# Altium PCB MCU.PcbDoc (part 2 of 2)
Units mil, origin at the board's own origin, x right, y up, seen from the top; angles counter-clockwise.
Board outline 3149.61 x 1968.5 mil, 4 copper layers (L1(Signal), L2(PWR), L3(GND), L4(Signal)), stack 59.53 mil thick; 84 components, 75 nets, 297 pads, 175 vias.
Unrouted connection lines stored in the file: 10.
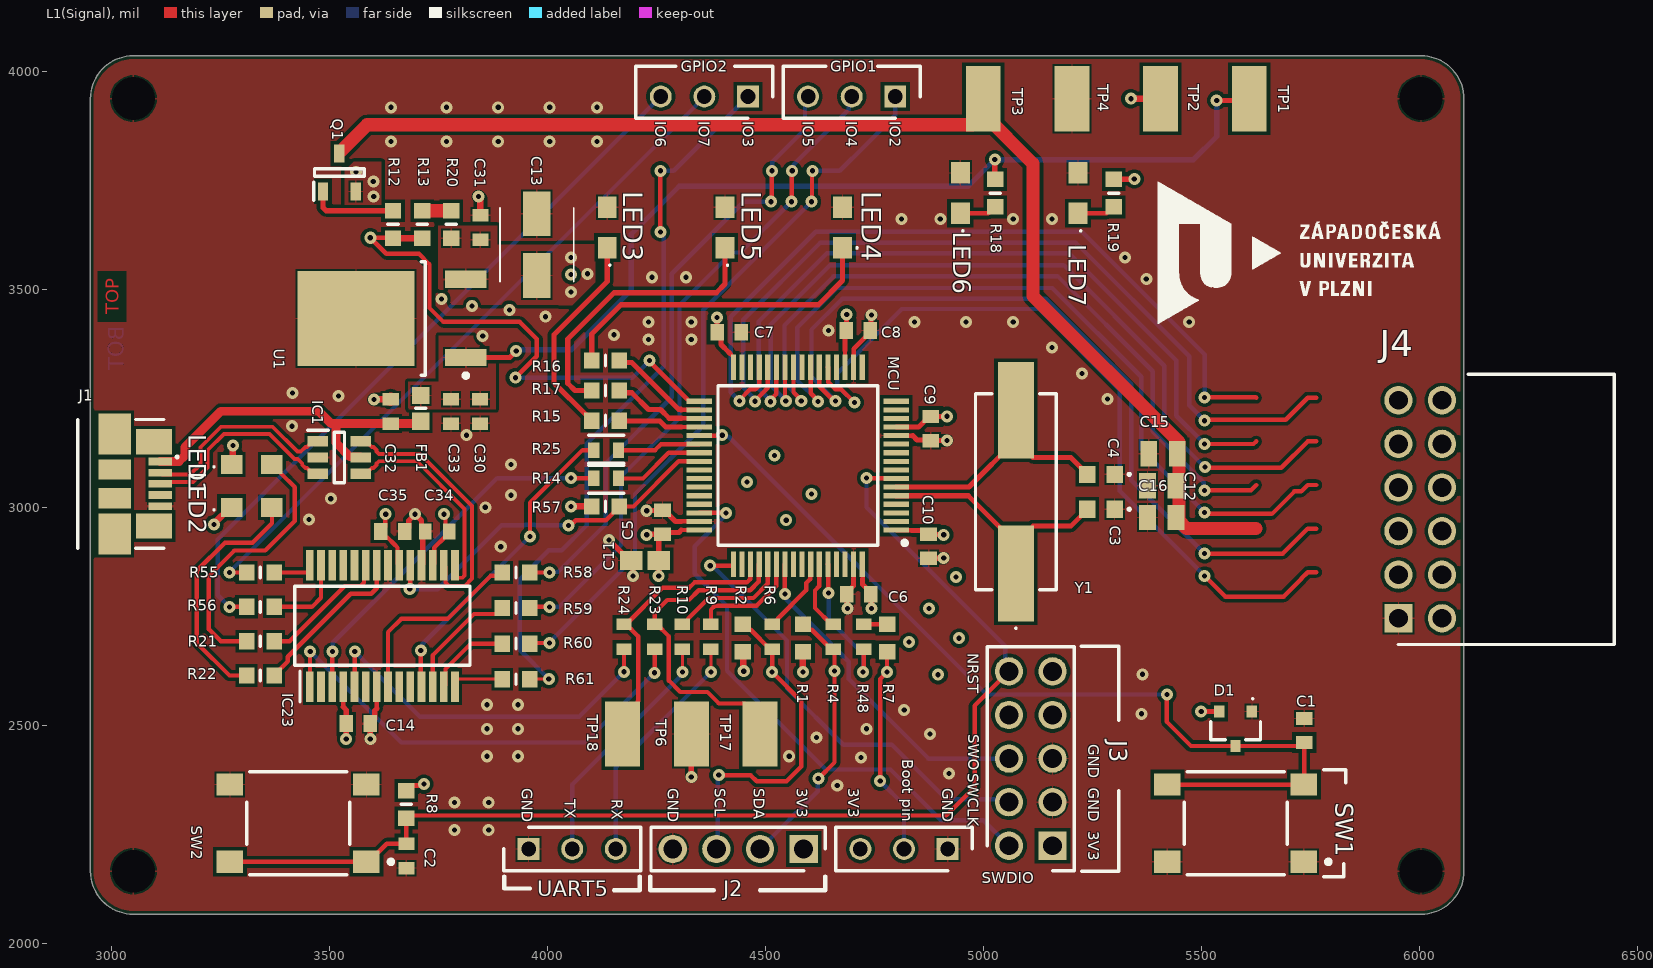
[diagram p0: L1(Signal) view]

## Polygon pours and split planes (outlines as drawn)
GND on L1(Signal) "GND_L01_P041" (solid, pour order 41): 6102.36,4035.43 6102.36,2066.93 2952.76,2066.93 2952.76,4035.43
+3V3 on L1(Signal) "+3V3_L01_P040" (solid, pour order 40): 4025.59,3464.57 4026.57,3463.58 4058.07,3463.58 4110.24,3515.75 4110.24,3603.35 4026.57,3603.35 4025.59,3602.36 3885.83,3602.36 3885.83,3645.67 3750,3645.67 3750,3464.57
+3V3 on L1(Signal) "+3V3_L01_P038" (solid, pour order 38): 3620.08,3730.31 3620.08,3792.32 3556.1,3792.32 3535.43,3771.65 3535.43,3688.98 3620.08,3688.98
+5V on L1(Signal) "+5V_L01_P039" (solid, pour order 39): 3881.89,3393.7 3881.89,3224.41 3681.1,3224.41 3681.1,3287.4 3751.97,3287.4 3751.97,3393.7
GND on L1(Signal) "GND_L01_P037" (solid, pour order 37): 3744.09,3212.6 3744.09,3149.61 3901.57,3149.61 3901.57,3153.54 3901.57,3212.6
+3V3 on L2(PWR) "+3V3_L02_P042" (solid, pour order 42): 2952.76,3937.01 3051.18,4035.43 6003.94,4035.43 6102.36,3937.01 6102.36,2165.35 6003.94,2066.93 3051.18,2066.93 2952.76,2165.35
GND on L3(GND) "GND_L03_P043" (solid, pour order 43): 2952.76,2066.93 6102.36,2066.93 6102.36,4035.43 2952.76,4035.43
GND on L4(Signal) "GND_L04_P044" (solid, pour order 44): 2952.76,4035.43 6102.36,4035.43 6102.36,2066.93 2952.76,2066.93

## Other copper
L1(Signal):
  text "TOP" at 3017.56,3443.07 h30 r90
L4(Signal):
  text "BOT" at 3029.37,3415.2 h35 r90

## Silkscreen, mask and mechanical layers (free items; w line width, h text height)
Top Overlay:
  drawing of 59 lines, arcs and shapes, not listed
  text "IO6" at 4248.13,3884.76 h25 r270
  text "IO7" at 4348.13,3884.76 h25 r270
  text "IO3" at 4448.13,3884.76 h25 r270
  text "IO5" at 4585.93,3884.76 h25 r270
  text "IO4" at 4685.93,3884.76 h25 r270
  text "IO2" at 4785.93,3884.76 h25 r270
  text "NRST" at 4964.65,2665.28 h25 r270
  text "SWO" at 4965.63,2479.25 h25 r270
  text "GND" at 5241.22,2457.14 h25 r270
  text "SWCLK" at 4964.65,2390.67 h25 r270
  text "GND" at 5241.22,2357.14 h25 r270
  text "GND" at 3942.01,2355.24 h25 r270
  text "GND" at 4276.65,2355.24 h25 r270
  text "SCL" at 4384.92,2355.24 h25 r270
  text "SDA" at 4473.5,2355.24 h25 r270
  text "3V3" at 4571.93,2355.24 h25 r270
  text "3V3" at 4690.04,2355.24 h25 r270
  text "GND" at 4906.57,2355.24 h25 r270
  text "TX" at 4040.43,2330.24 h25 r270
  text "RX" at 4148.7,2330.24 h25 r270
  text "3V3" at 5241.22,2257.14 h25 r270
  text "SWDIO" at 4996.14,2137.87 h25
Bottom Overlay:
  text "J.SYKORA" at 5980.31,3704.72 h45
  text "HALL PROBE v1" at 5980.31,3618.11 h40
  text ".Print_Date" at 5980.31,3551.18 h35
Mechanical 1:
  the board outline again, w10